# Altium PCB AT89S52单片机入门与提高_改.PcbDoc
Units mm, origin at the board's own origin, x right, y up, seen from the top; angles counter-clockwise.
Board outline 152.4 x 101.6 mm, 2 copper layers (Top Layer, Bottom Layer); 111 components, 112 nets, 451 pads, 42 vias.
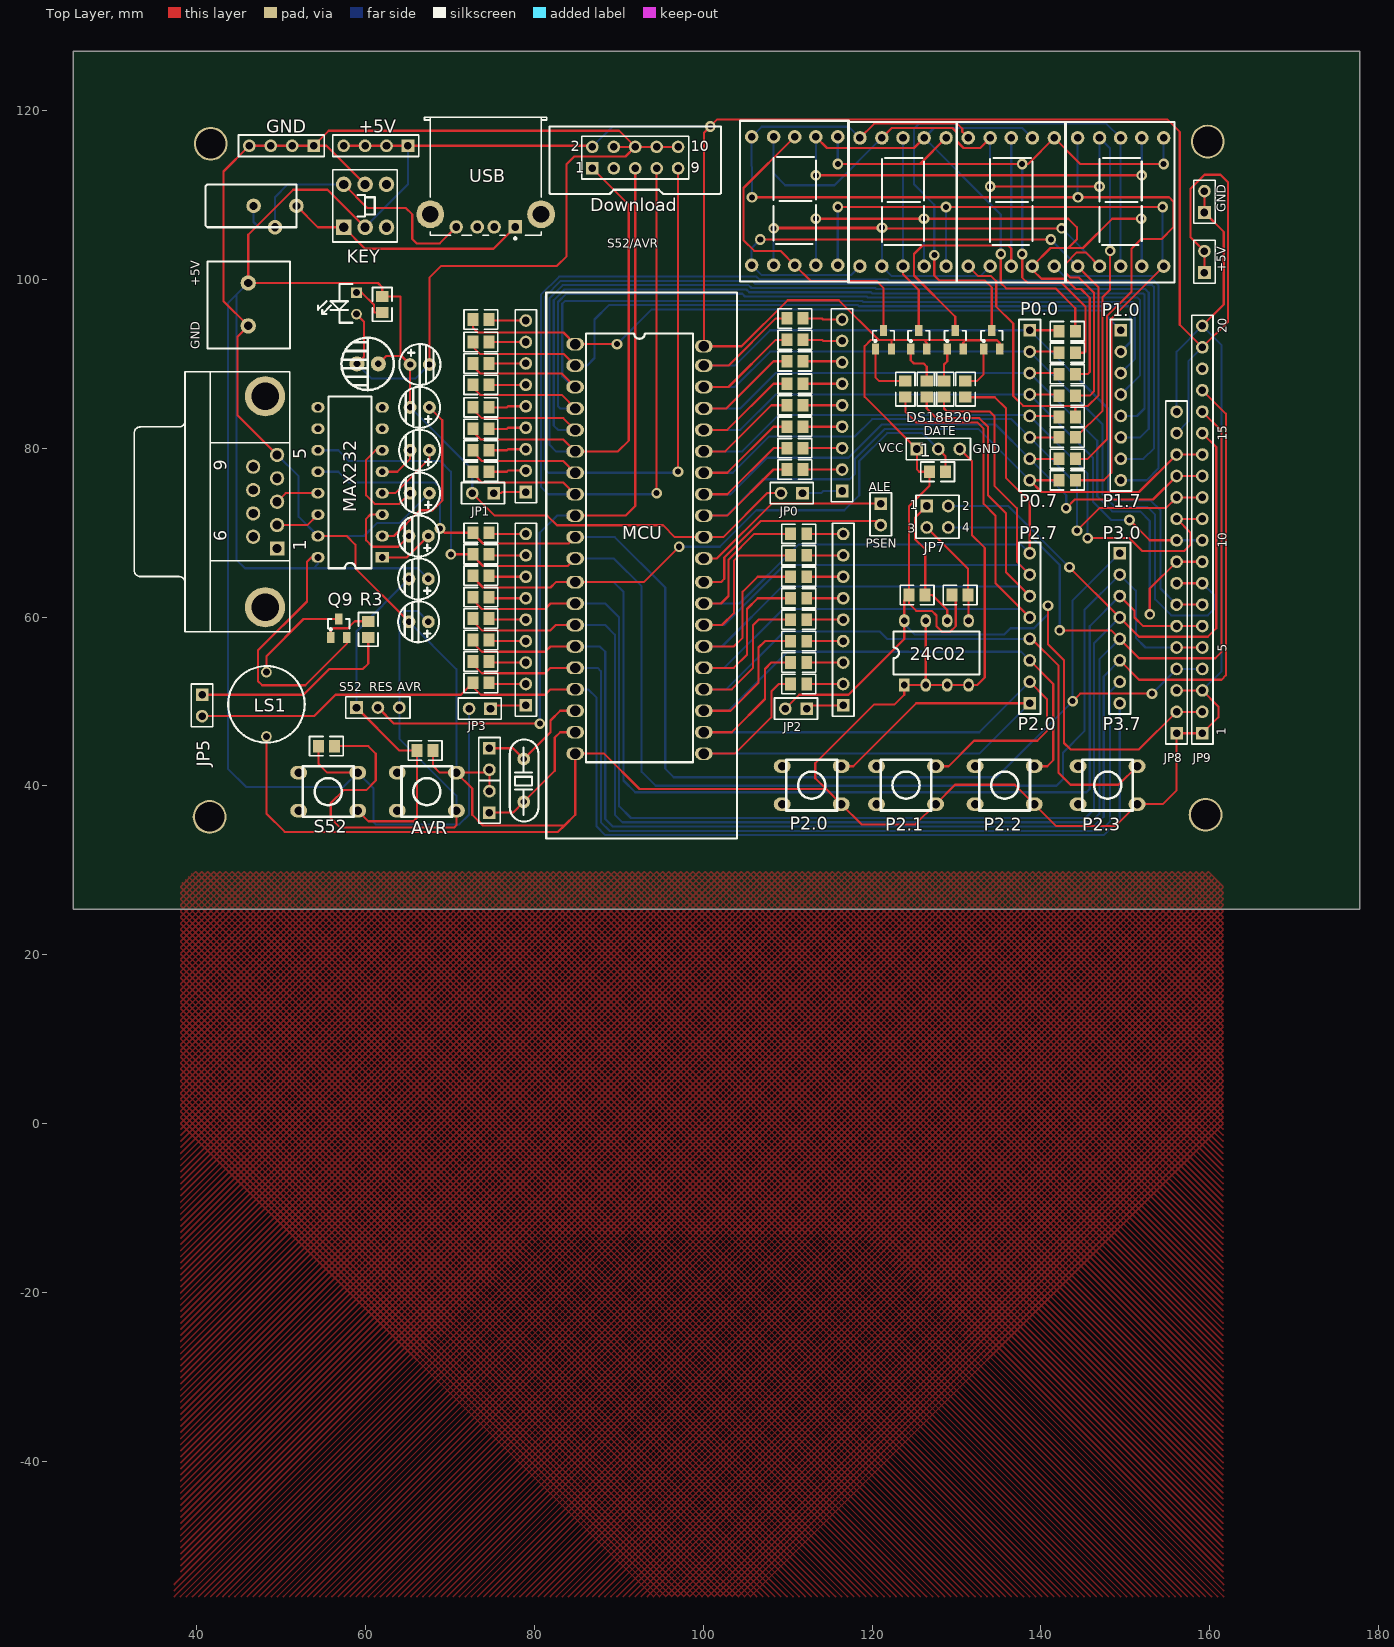
[diagram p0: Top Layer view]
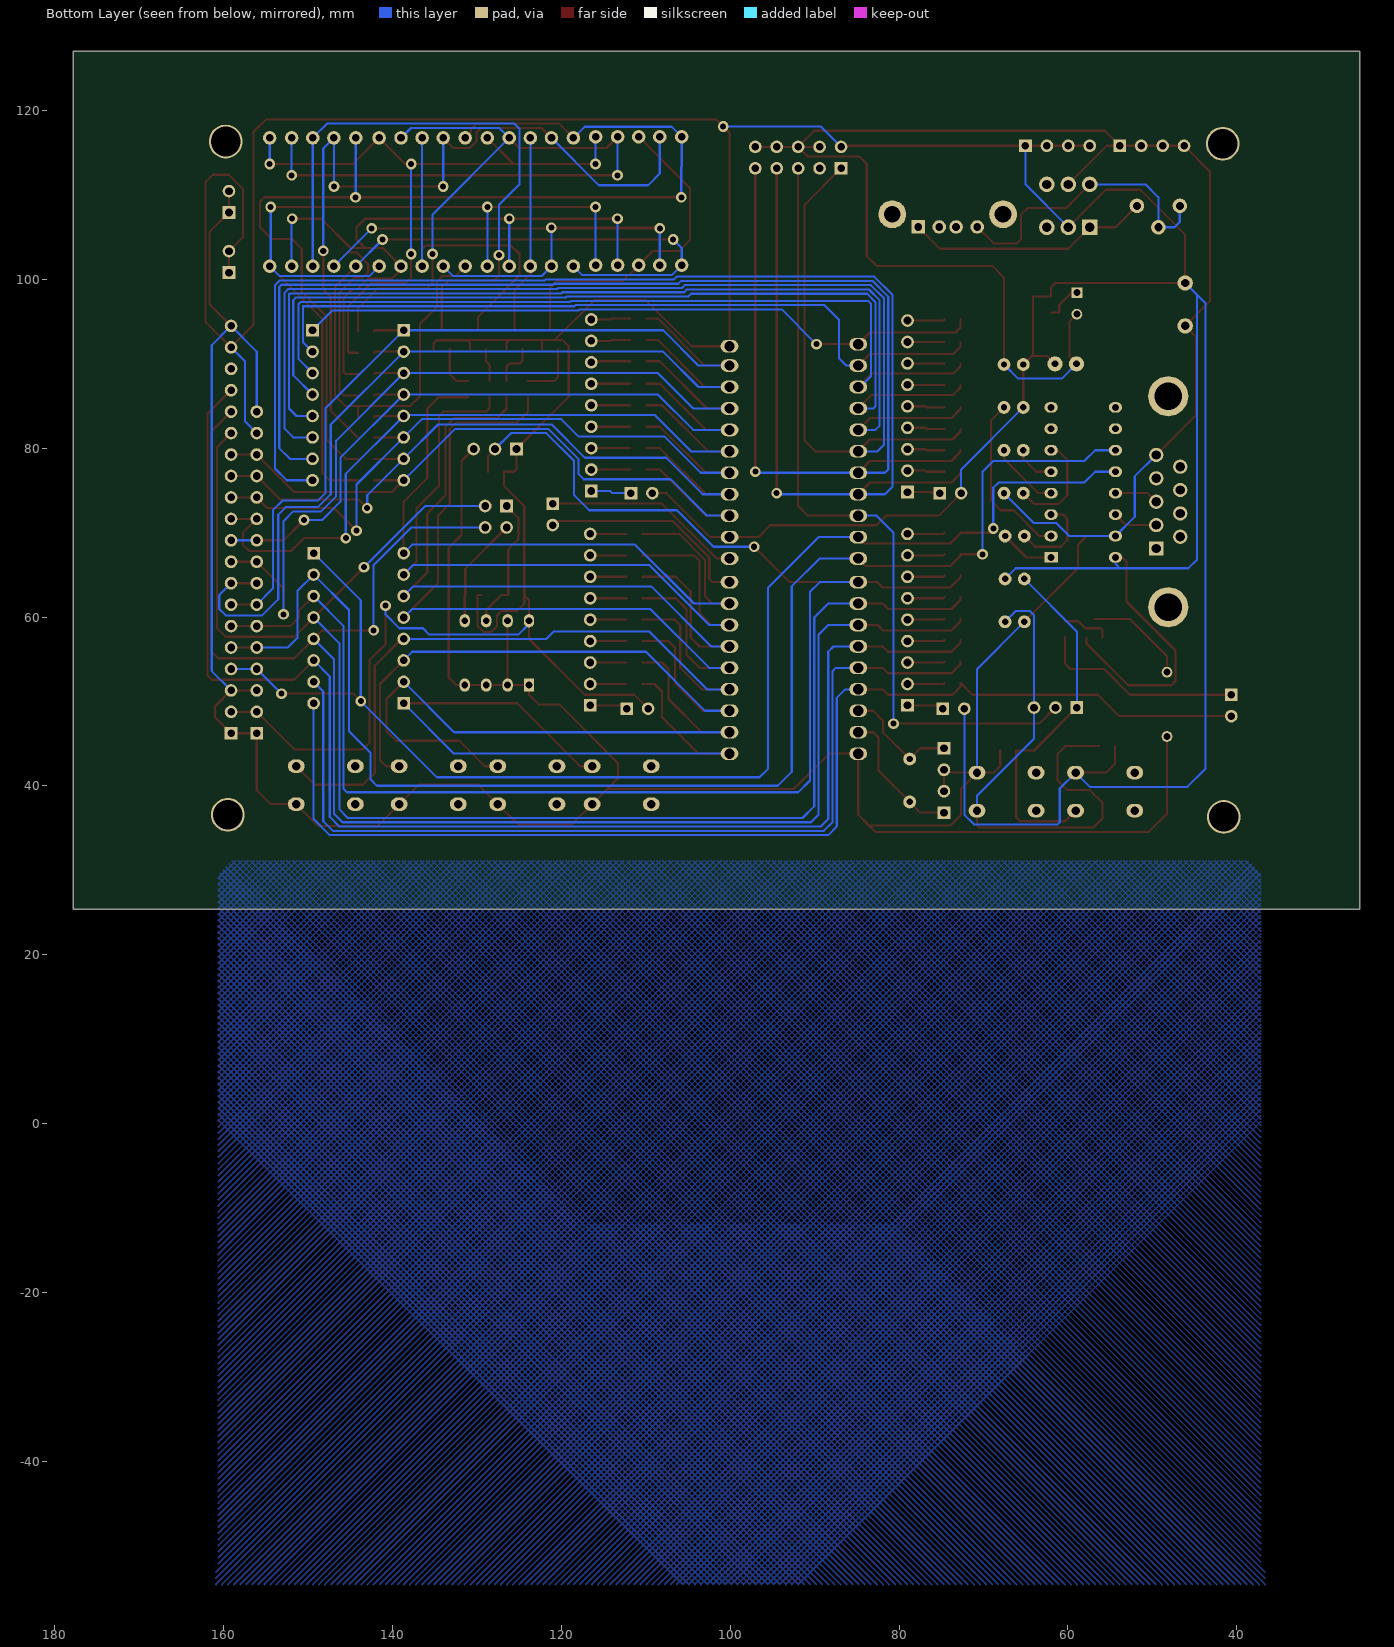
[diagram p1: Bottom Layer view, seen from below]

## Layer stack, top to bottom
Top Layer: signal copper 0.0356
Dielectric: dielectric 0.32, FR-4, Dk 4.8
Bottom Layer: signal copper 0.0356

## Board outline
25.4,25.4 177.8,25.4 177.8,127 25.4,127

## Design rules (kind name [scope] priority, off if disabled: settings)
Clearance [All] p1: gap=0.254
ComponentClearance [All] p1: gap=0.254 collisioncheckmode=3 verticalgap=0.254
PolygonConnect [All] p1: connectstyle=Relief reliefconductorwidth=0.254 reliefentries=4 polygonreliefangle="90 Angle"
RoutingVias [All] p1: holewidth=0.711 width=1.27 viastyle="Through Hole" minholewidth=0.711 minwidth=1.27 maxholewidth=0.711 maxwidth=1.27
SolderMaskExpansion [All] p1: expansion=0.102
TestPointUsage [All] p1: valid=0 allowmultiple=FALSE
Testpoint [All] p1: side=15 testpointundercomponent=TRUE minsize=1.016 maxsize=2.54 preferedsize=1.524 minholesize=0 maxholesize=1.016 preferedholesize=0.813 testpointgrid=0.025 style=1023 order=0123456789
Width Width_3 [InNet('NetJ1_1')] p1: maxlimit=0.5 minlimit=0.5 preferedwidth=0.5
Width Width_2 [InNet('NetJ1_2')] p2: maxlimit=0.5 minlimit=0.5 preferedwidth=0.5
Width Width_1 [InNet('VCC')] p3: maxlimit=0.5 minlimit=0.5 preferedwidth=0.5
Width [All] p4: maxlimit=0.254 minlimit=0.254 preferedwidth=0.254
17 further rules are at their usual default settings.

## Classes and differential pairs
component class AT89S52单片机入门与提高: +5V AVR Designator5

## Components (designator, comment, footprint, x,y, rotation, side; value= is the part's Value field where it differs from the comment)
1 "470" R2012-0805 127.762,77.216 r180 top (schematic designator R20)
24C02 "24LC02" DIP8 123.825,51.943 r90 top (schematic designator U2)
+5V "Comment" HDR-2 160.528,104.648 r90 top
+5V "" JK128 47.244,99.06 r0 top (schematic designator POWER)
+5V "" HDR1X4 65.024,115.824 r180 top
ALE "Comment" HDR-2 119.888,69.596 r270 top
AVR "" an-6*6 61.087,44.45 r180 top
C1 "100uF\25v" C-DJ-6 58.928,89.916 r180 top
C2 "10uf" C-DJ-4 65.024,67.056 r180 top
C3 "10uf" C-DJ-4 65.024,61.976 r180 top
C5 "10uf" C-DJ-4 67.691,87.376 r0 top
C6 "10uf" C-DJ-4 65.151,87.376 r180 top
C7 "10uf" C-DJ-4 65.151,82.296 r180 top
C8 "10uf" C-DJ-4 65.151,77.216 r180 top
C9 "10uf" C-DJ-4 65.024,72.136 r180 top
CX1 "30p" HDR1X2 74.676,36.83 r90 top
CX2 "30p" HDR1X2 74.676,44.45 r270 top
D1-0 "LED" R2012-0805 110.871,95.377 r180 top
D1-1 "LED" R2012-0805 73.66,95.25 r180 top
D1-2 "LED" R2012-0805 111.318,52.07 r180 top
D1-3 "LED" R2012-0805 73.66,69.977 r180 top
D2-0 "LED" R2012-0805 110.871,92.837 r180 top
D2-1 "LED" R2012-0805 73.66,92.583 r180 top
D2-2 "LED" R2012-0805 111.318,54.61 r180 top
D2-3 "LED" R2012-0805 73.66,67.437 r180 top
D3-0 "LED" R2012-0805 110.871,90.297 r180 top
D3-1 "LED" R2012-0805 73.66,90.043 r180 top
D3-2 "LED" R2012-0805 111.318,57.15 r180 top
D3-3 "LED" R2012-0805 73.66,64.897 r180 top
D4-0 "LED" R2012-0805 110.871,87.63 r180 top
D4-1 "LED" R2012-0805 73.66,87.503 r180 top
D4-2 "LED" R2012-0805 111.318,59.69 r180 top
D4-3 "LED" R2012-0805 73.66,62.357 r180 top
D5-0 "LED" R2012-0805 110.871,85.09 r180 top
D5-1 "LED" R2012-0805 73.66,84.836 r180 top
D5-2 "LED" R2012-0805 111.318,62.23 r180 top
D5-3 "LED" R2012-0805 73.66,59.817 r180 top
D6-0 "LED" R2012-0805 110.871,82.55 r180 top
D6-1 "LED" R2012-0805 73.66,82.296 r180 top
D6-2 "LED" R2012-0805 111.318,64.77 r180 top
D6-3 "LED" R2012-0805 73.66,57.277 r180 top
D7-0 "LED" R2012-0805 110.871,80.01 r180 top
D7-1 "LED" R2012-0805 73.66,79.756 r180 top
D7-2 "LED" R2012-0805 111.318,67.31 r180 top
D7-3 "LED" R2012-0805 73.66,54.737 r180 top
D8-0 "LED" R2012-0805 110.871,77.47 r180 top
D8-1 "LED" R2012-0805 73.66,77.216 r180 top
D8-2 "LED" R2012-0805 111.318,69.85 r180 top
D8-3 "LED" R2012-0805 73.66,52.197 r180 top
Download "Download" HDR-2x5 91.948,113.284 r0 top
DS1 "LG5011BSR" LED-BSR 110.744,106.807 r0 top
DS2 "LG5011BSR" LED-BSR 123.571,106.68 r0 top
DS3 "LG5011BSR" LED-BSR 136.398,106.68 r0 top
DS4 "LG5011BSR" LED-BSR 149.352,106.68 r0 top
DS18B20 "Comment" HDR-3 131.572,78.74 r0 top
GND "Comment" HDR-2 160.528,111.76 r90 top
GND "" HDR1X4 53.848,115.824 r180 top
J61 "D Connector 9" DSUB1.385-2H9 38.608,73.66 r90 top
JP0 "" HDR1X2 111.76,74.676 r180 top
JP1 "" HDR1X2 75.184,74.676 r180 top
JP2 "" HDR1X2 112.268,49.149 r180 top
JP3 "" HDR1X2 74.803,49.149 r180 top
JP5 "" HDR1X2 40.64,50.8 r270 top (schematic designator JP6)
JP7 "" HDR2X2 126.492,73.152 r270 top
JP8 "Header 16" HDR1X16 156.083,46.228 r90 top
JP9 "" HDR1X20 159.131,46.228 r90 top
KEY "SW-DPST" DPDT-6 59.944,108.712 r90 top
LED1 "LED" LED 58.42,96.393 r90 top
LS1 "" LS1PF 48.26,53.467 r270 top
MAX232 "MAX232" DIP16 61.976,67.056 r180 top (schematic designator U4)
MCU "AT89S52" AT89S52Pid 116.84,65.532 r0 top (schematic designator U1)
P0.0 "" HDR1X8 138.684,93.98 r270 top (schematic designator P0)
P1.0 "" HDR1X8 149.479,93.98 r270 top (schematic designator P1)
P2.0 "" HDR1X8 138.684,49.784 r90 top (schematic designator P2)
P2.0 "key1" an-6*6 106.68,45.212 r180 top
P2.1 "key2" an-6*6 117.856,45.212 r180 top
P2.2 "key3" an-6*6 129.54,45.212 r180 top
P2.3 "key4" an-6*6 141.732,45.212 r180 top
P3.0 "" HDR1X8 149.352,67.564 r270 top (schematic designator P3)
P-R0 "" HDR1X9#1 116.459,95.25 r270 top
P-R1 "" HDR1X9#1 78.994,95.123 r270 top
P-R2 "" HDR1X9#2 116.586,49.53 r90 top
P-R3 "" HDR1X9#1 78.994,69.85 r270 top
Q1 "2N3906" SO-G3 122.301,92.71 r0 top
Q2 "2N3906" SO-G3 126.492,92.71 r0 top
Q3 "2N3906" SO-G3 130.81,92.71 r0 top
Q4 "2N3906" SO-G3 135.128,92.71 r0 top
Q9 "2N3906" SO-G3 57.785,58.547 r0 top
R1 "4.7k" R2012-0805 61.976,97.028 r270 top
R3 "10k" R2012-0805 60.325,58.547 r90 top
R4 "10k" R2012-0805 130.429,62.611 r180 top
R5 "10k" R2012-0805 125.349,62.611 r180 top
R11 "470" R2012-0805 143.129,93.853 r0 top
R12 "470" R2012-0805 143.129,91.313 r0 top
R13 "470" R2012-0805 143.129,88.773 r0 top
R14 "470" R2012-0805 143.129,86.233 r0 top
R15 "470" R2012-0805 143.129,83.693 r0 top
R16 "470" R2012-0805 143.129,81.28 r0 top
R17 "470" R2012-0805 143.129,78.74 r0 top
R18 "470" R2012-0805 143.129,76.2 r0 top
R20 "470" R2012-0805 123.952,86.995 r90 top
R21 "470" R2012-0805 126.492,86.995 r90 top
R22 "470" R2012-0805 128.524,86.995 r90 top
R23 "470" R2012-0805 131.064,86.995 r90 top
R51 "10k" R2012-0805 67.056,44.196 r0 top
Ravr "10k" R2012-0805 55.372,44.704 r180 top
RES "" HDR1X3 58.928,49.276 r0 top
S52 "" an-6*6 49.403,44.45 r180 top
USB "" USB-5V 70.612,108.712 r90 top
Y "Y" 11.0592M 78.74,43.18 r90 top
? "Comment" "prower xiao" 49.276,103.632 r0 top

## Footprints (in the part's own frame and the unit in brackets; to place one, negate y for a bottom-side part, rotate by r counter-clockwise, add the part's x,y. Pads: shape width x height; smd on the part's side, far side on the other; paste and mask are expansions set on the pad)
11.0592M [mil]
  round 60 hole 30: 1(-200,0) 2(0,0)
  silkscreen extent -292,-68 92,65
an-6*6 [mm]
  oval 2x1.6 hole 1: 1(-9.675,7.381) 2(-9.675,2.881) 3(-2.675,2.881) 4(-2.675,7.381)
  silkscreen extent -9.17,2.13 -3.18,8.13
AT89S52Pid [mil]
  oval 82.87x59.24 hole 47.75: 1(-1260.15,1054.96) 2(-1260.15,954.96) 3(-1260.15,854.96) 4(-1260.15,754.96) 5(-1260.15,654.96) 6(-1260.15,554.96) 7(-1260.15,454.96) 8(-1260.15,354.96) 9(-1260.15,254.96) 10(-1260.15,154.96) 11(-1260.15,54.96) 12(-1260,-55) 13(-1260,-155) 14(-1260,-255) 15(-1260,-355) 16(-1260,-455) 17(-1260,-555) 18(-1260,-655) 19(-1260,-755) 20(-1260,-855) 21(-660,-855) 22(-660,-755) 23(-660,-655) 24(-660,-555) 25(-660,-455) 26(-660,-355) 27(-660,-255) 28(-660,-155) 29(-660,-55) 30(-660.15,54.96) 31(-660.15,154.96) 32(-660.15,254.96) 33(-660.15,354.96) 34(-660.15,454.96) 35(-660.15,554.96) 36(-660.15,654.96) 37(-660.15,754.96) 38(-660.15,854.96) 39(-660.15,954.96) 40(-660,1045)
  silkscreen extent -1395,-1250 -505,1295
C-DJ-4 [mil]
  round 60 hole 30: 1(-95,100) 2(-5,100)
  silkscreen extent -145,5 46,195
C-DJ-6 [mm]
  round 1.8 hole 0.8: 1(-2.591,-0.076) 2(-0.051,-0.076)
  silkscreen extent -4.42,-3.18 1.78,3.02
DIP8 [mil]
  rect 62x48 hole 32: 1(-0.15,-0.04)
  oval 62x48 hole 32: 2(-0.15,-100.04) 3(-0.15,-200.04) 4(-0.15,-300.04) 5(299.85,-300.04) 6(299.85,-200.04) 7(299.85,-100.04) 8(299.85,-0.04)
  silkscreen extent 50,-350 250,50
DIP16 [mil]
  rect 62x49.21 hole 32: 1(-0.15,-0.04)
  oval 62x49.21 hole 32: 2(-0.15,-100.04) 3(-0.15,-200.04) 4(-0.15,-300.04) 5(-0.15,-400.04) 6(-0.15,-500.04) 7(-0.15,-600.04) 8(-0.15,-700.04) 9(299.85,-700.04) 10(299.85,-600.04) 11(299.85,-500.04) 12(299.85,-400.04) 13(299.85,-300.04) 14(299.85,-200.04) 15(299.85,-100.04) 16(299.85,-0.04)
  silkscreen extent 50,-750 250,50
DPDT-6 [mm]
  round 1.85 hole 1.1: 0(-2.54,-2.54) 0(2.54,-2.54) 2(-2.54,0) 3(2.54,0) 4(2.54,2.54)
  rect 1.85x1.85 hole 1.1: 1(-2.54,2.54)
  silkscreen extent -4.28,-3.81 4.28,3.81
DSUB1.385-2H9 [mm] "Connector; D Subminiature; 9 Position; Right Angle; Pitch 1.385 mm"
  rect 1.69x1.69 hole 1.09: 1(-5.54,-10.92)
  round 1.69 hole 1.09: 2(-2.77,-10.92) 3(0,-10.92) 4(2.77,-10.92) 5(5.54,-10.92) 6(-4.155,-8.08) 7(-1.385,-8.08) 8(1.385,-8.08) 9(4.155,-8.08)
  round 4.76 hole 3.26: 10(-12.495,-9.5) 11(12.495,-9.5)
  silkscreen extent -15.4,-12.4 15.4,6
HDR1X2 [mm] "Connector; Header; 2 Position"
  rect 1.5x1.5 hole 0.9: 1(0,0)
  round 1.5 hole 0.9: 2(2.54,0)
  silkscreen extent -1.27,-1.27 3.81,1.27
HDR1X3 [mm] "Connector; Header; 3 Position"
  rect 1.5x1.5 hole 0.9: 1(0,0)
  round 1.5 hole 0.9: 2(2.54,0) 3(5.08,0)
  silkscreen extent -1.27,-1.27 6.35,1.27
HDR1X4 [mm] "Connector; Header; 4 Position"
  rect 1.5x1.5 hole 0.9: 1(0,0)
  round 1.5 hole 0.9: 2(2.54,0) 3(5.08,0) 4(7.62,0)
  silkscreen extent -1.27,-1.27 8.89,1.27
HDR1X8 [mm] "Connector; Header; 8 Position"
  rect 1.5x1.5 hole 0.9: 1(0,0)
  round 1.5 hole 0.9: 2(2.54,0) 3(5.08,0) 4(7.62,0) 5(10.16,0) 6(12.7,0) 7(15.24,0) 8(17.78,0)
  silkscreen extent -1.27,-1.27 19.05,1.27
HDR1X9#1 [mm] "Connector; Header; 9 Position"
  round 1.5 hole 0.9: 1(0,0) 2(2.54,0) 3(5.08,0) 4(7.62,0) 5(10.16,0) 6(12.7,0) 7(15.24,0) 8(17.78,0)
  rect 1.5x1.5 hole 0.9: 9(20.32,0)
  silkscreen extent -1.27,-1.27 21.59,1.27
HDR1X9#2 [mm] "Connector; Header; 9 Position"
  rect 1.5x1.5 hole 0.9: 1(0,0)
  round 1.5 hole 0.9: 2(2.54,0) 3(5.08,0) 4(7.62,0) 5(10.16,0) 6(12.7,0) 7(15.24,0) 8(17.78,0) 9(20.32,0)
  silkscreen extent -1.27,-1.27 21.59,1.27
HDR1X16 [mm] "Connector; Header; 16 Position"
  rect 1.5x1.5 hole 0.9: 1(0,0)
  round 1.5 hole 0.9: 2(2.54,0) 3(5.08,0) 4(7.62,0) 5(10.16,0) 6(12.7,0) 7(15.24,0) 8(17.78,0) 9(20.32,0) 10(22.86,0) 11(25.4,0) 12(27.94,0) 13(30.48,0) 14(33.02,0) 15(35.56,0) 16(38.1,0)
  silkscreen extent -1.27,-1.27 39.37,1.27
HDR1X20 [mm] "Connector; Header; 20 Position"
  rect 1.5x1.5 hole 0.9: 1(0,0)
  round 1.5 hole 0.9: 2(2.54,0) 3(5.08,0) 4(7.62,0) 5(10.16,0) 6(12.7,0) 7(15.24,0) 8(17.78,0) 9(20.32,0) 10(22.86,0) 11(25.4,0) 12(27.94,0) 13(30.48,0) 14(33.02,0) 15(35.56,0) 16(38.1,0) 17(40.64,0) 18(43.18,0) 19(45.72,0) 20(48.26,0)
  silkscreen extent -1.27,-1.27 49.53,1.27
HDR2X2 [mm] "Connector; Header; 2x2 Position"
  rect 1.5x1.5 hole 0.9: 1(0,0)
  round 1.5 hole 0.9: 2(0,2.54) 3(2.54,0) 4(2.54,2.54)
  silkscreen extent -1.27,-1.27 3.81,3.81
HDR-2 [mm]
  rect 1.5x1.5 hole 0.9: 1(-3.84,1.148)
  round 1.5 hole 0.9: 2(-1.3,1.148)
  silkscreen extent -5.11,-0.12 -0.03,2.42
HDR-2x5 [mm]
  rect 1.5x1.5 hole 0.9: 1(-5.08,-0.127)
  round 1.5 hole 0.9: 2(-5.08,2.413) 3(-2.54,-0.127) 4(-2.54,2.413) 5(0,-0.127) 6(0,2.413) 7(2.54,-0.127) 8(2.54,2.413) 9(5.08,-0.127) 10(5.08,2.413)
  silkscreen extent -10.16,-3.17 10.16,4.83
HDR-3 [mm]
  rect 1.5x1.5 hole 0.9: 1(-6.253,1.165)
  round 1.5 hole 0.9: 2(-3.713,1.165) 3(-1.173,1.165)
  silkscreen extent -7.52,-0.11 0.1,2.43
JK128 [mil]
  round 71.81 hole 39.37: 1(-45,20) 2(-45,-180)
  silkscreen extent -235,-285 150,120
LED [mil]
  rect 50x50 hole 32: 1(80,-20)
  round 50 hole 32: 2(-20,-20)
  silkscreen extent -60,0 120,160
LED-BSR [mm]
  round 1.6 hole 0.9: 1(-5,-5.119) 2(-2.4,-5.119) 3(0.1,-5.119) 4(2.6,-5.119) 5(5.2,-5.119) 6(5.2,10.081) 7(2.6,10.081) 8(0.1,10.081) 9(-2.4,10.081) 10(-5,10.081)
  silkscreen extent -6.4,-7.07 6.5,11.98
LS1PF [mil] "LS1"
  round 50 hole 32: 1(0,0) 2(300,0)
  silkscreen extent -28,-178 328,178
"prower xiao" [mm]
  round 1.724 hole 0.962: 1(2.54,5.08) 2(0,2.54) 3(-2.54,5.08)
  silkscreen extent -8.25,2.54 2.54,7.62
R2012-0805 [mm] "Thermistor; 2 Leads"
  rect 1.3x1.5 smd: 1(-0.95,0) 2(0.95,0)
  silkscreen extent -2,-1.15 2,1.15
SO-G3 [mm] "SOT-23; 3 Leads; Body 3.0 x 2.6 mm, inc. leads (LxW max)"
  rect 0.85x1.3 smd: 1(-1.9,-0.983) 2(0,-0.983) 3(-0.95,1.217)
  silkscreen extent -2.23,-0.12 0.32,1.22
USB-5V [mm]
  rect 1.6x1.6 hole 0.92: 1(-2.503,-7.123)
  round 1.6 hole 0.92: 2(-2.503,-4.624) 3(-2.503,-2.624) 4(-2.503,-0.124)
  round 3.3 hole 2: 5(-1.002,2.947) 6(-1.002,-10.193)
  silkscreen extent -3.98,-10.87 10.5,3.63

## Part data
1 R1 R3 R4 R5 R11 R12 R13 R14 R15 R16 R17 R18 R20 R21 R22 R23 R51 Ravr: library part RES2
+5V JP0 JP1 JP2 JP3 JP5: library part "Header 2", "Header, 2-Pin"
+5V GND USB: library part "Header 4", "Header, 4-Pin"
AVR S52: library part SW-PB, "Switch"
C1 C2 C3 C5 C6 C7 C8 C9: library part "CAPACITOR POL", "Capacitor"
CX1 CX2: library part CAP, "Capacitor"
Download: library part "Header 5X2", "Header, 5-Pin, Dual row"
DS1 DS2 DS3 DS4: library part "Dpy Blue-CA", "14.2 mm General Purpose Blue 7-Segment Display: CA, RH DP, Gray Surface"
J61: "Receptacle Assembly, 9 Position, Right Angle"
JP7: library part "Header 2X2", "Header, 2-Pin, Dual row"
JP8: "Header, 16-Pin"
JP9: library part "Header 20", "Header, 20-Pin"
KEY: "Double-Pole, Single-Throw Switch"
LS1: library part Speaker, "Loudspeaker"
MCU: library part 8051
P0.0 P1.0 P2.0 P3.0: library part MHDR1X8, "Header, 8-Pin"
P2.0 P2.1 P2.2 P2.3: library part key
P-R0 P-R1 P-R2 P-R3: library part MHDR1X9, "Header, 9-Pin"
Q1 Q2 Q3 Q4 Q9: "PNP General Purpose Amplifier"
RES: library part "Header 3", "Header, 3-Pin"
Y: library part CRYSTAL, "Crystal"

## Free pads (board coordinates)
  round 4 hole 3.5: ""(41.529,36.322) ""(41.656,116.078) ""(159.512,36.576) ""(159.766,116.332)

## Via types
v1: diameter 1.27, hole 0.711, Top Layer to Bottom Layer, 42 vias

## Nets (pads, with @x,y where several pads share a name; then routed paths per layer and width w, separated by ;. In a path a pad name is that pad's centre, name@x,y a point inside that pad or via, vN(x,y) a via of type N, cw(c..) or ccw(c..) an arc to the next point about the centre after c; other vN are vias at no path point)
A: DS1.7 DS2.7 DS3.7 DS4.7 R11.2 | length 109
  Top Layer w0.254: v1(113.344,112.328) v1(151.952,112.328) ; DS1.7 114.662,115.57 124.98,115.57 DS2.7 ; v1(135.255,102.997) 135.255,99.568 135.89,98.933 141.742,98.933 144.079,96.596 R11.2
  Bottom Layer w0.254: v1(113.344,112.328) DS1.7 ; v1(135.255,102.997) 135.255,107.677 DS2.7 127.352,117.942 137.817,117.942 DS3.7 ; v1(151.952,112.328) DS4.7
ALE: ALE.1 MCU.30 | length 23.7
  Top Layer w0.254: MCU.30 101.599,66.928 108.107,73.436 ALE.1
B: DS1.6 DS2.6 DS3.6 DS4.6 R12.2 | length 80.8
  Top Layer w0.254: v1(115.951,113.665) 125.675,113.665 ; DS2.6 125.675,113.665 ; v1(137.795,102.997) 137.795,100.203 138.43,99.568 142.494,99.568 145.288,96.774 145.288,91.44 145.161,91.313 R12.2 ; v1(154.552,113.658) 144.701,113.658 DS3.6 138.502,113.665 v1(137.795,113.665) 125.675,113.665
  Bottom Layer w0.254: DS1.6 115.944,113.672 v1(115.951,113.665) ; v1(137.795,102.997) v1(137.795,113.665) ; v1(154.552,113.658) DS4.6
C: DS1.4 DS2.4 DS3.4 DS4.4 R13.2 | length 85.4
  Top Layer w0.254: v1(113.344,107.188) v1(126.171,107.188) 143.256,107.188 144.272,106.172 144.272,104.728 143.256,103.712 ; R13.2 145.542,88.773 145.796,89.027 145.796,97.814 144.749,98.861 144.134,98.861 142.919,100.076 140.081,100.076 138.998,101.159 DS3.4 141.149,103.712 143.256,103.712 ; v1(151.892,107.188) 148.463,107.188 144.987,103.712 143.256,103.712
  Bottom Layer w0.254: DS1.4 v1(113.344,107.188) ; DS2.4 v1(126.171,107.188) ; v1(151.892,107.188) 151.952,107.128 DS4.4
D: DS1.2 DS2.2 DS3.2 DS4.2 R14.2 | length 100.9
  Top Layer w0.254: v1(121.183,106.121) 108.42,106.121 v1(108.344,106.045) 121.183,106.045 v1(142.468,106.045) ; R14.2 145.796,86.233 146.304,86.741 146.304,98.425 144.526,100.203 143.51,100.203 142.875,100.838 142.875,101.807 144.272,103.204 145.309,103.204 DS4.2
  Bottom Layer w0.254: DS1.2 v1(108.344,106.045) ; v1(121.183,106.121) 121.171,106.109 DS2.2 122.352,100.38 132.817,100.38 DS3.2 ; v1(142.468,106.045) DS4.2
DP: DS1.5 DS2.5 DS3.5 DS4.5 R18.2 | length 105.1
  Top Layer w0.254: v1(115.951,108.585) v1(128.771,108.585) v1(154.432,108.585) ; R18.2 147.447,76.2 148.336,77.089 148.336,95.345 DS4.5
  Bottom Layer w0.254: DS1.5 115.944,108.578 v1(115.951,108.585) ; DS2.5 v1(128.771,108.585) ; DS3.5 142.779,100.38 153.371,100.38 DS4.5 154.432,101.681 v1(154.432,108.585)
E: DS1.1 DS2.1 DS3.1 DS4.1 R15.2 | length 103.4
  Top Layer w0.254: v1(106.76,104.728) v1(141.185,104.728) ; DS3.1 132.579,100.38 134.112,100.38 134.722,99.77 134.722,96.774 136.728,94.767 136.728,86.182 137.897,85.014 143.901,85.014 ; R15.2 144.079,84.836 143.901,85.014 ; DS4.1 146.812,99.101 146.812,86.233 145.593,85.014 143.901,85.014
  Bottom Layer w0.254: v1(106.76,104.728) 105.744,103.712 DS1.1 106.925,100.507 117.517,100.507 DS2.1 ; v1(141.185,104.728) DS4.1
F: DS1.9 DS2.9 DS3.9 DS4.9 R16.2 | length 97.7
  Top Layer w0.254: DS2.9 122.352,117.942 129.531,117.942 130.073,117.399 130.073,116.332 130.835,115.57 132.807,115.57 DS3.9 ; v1(133.998,110.998) v1(146.939,110.998) ; R16.2 144.145,81.28 147.32,84.455 147.32,97.917 148.209,98.806 v1(148.209,103.378)
  Bottom Layer w0.254: DS1.9 108.344,112.534 109.728,111.15 115.561,111.15 DS2.9 ; v1(133.998,110.998) DS3.9 ; v1(146.939,110.998) 146.952,111.011 DS4.9 148.209,115.504 v1(148.209,103.378)
G: DS1.10 DS2.10 DS3.10 DS4.10 R17.2 | length 130.2
  Top Layer w0.254: v1(105.791,109.728) v1(144.399,109.728) 155.194,109.728 155.702,109.22 155.702,106.172 154.305,104.775 151.892,104.775 150.749,103.632 150.749,98.552 147.828,95.631 147.828,81.026 145.542,78.74 R17.2 ; DS2.10 120.26,118.45 130.095,118.45 130.688,117.856 130.688,117.47 DS3.10
  Bottom Layer w0.254: v1(105.791,109.728) 105.791,109.855 DS1.10 106.941,118.085 117.247,118.085 DS2.10 ; DS4.10 144.352,109.775 v1(144.399,109.728)
GND: 24C02.1 24C02.2 24C02.3 24C02.4 24C02.7 +5V.2@46.101,94.488 AVR.2 C1.2 C3.2 C5.2 C8.1 CX1.2 CX2.2 Download.4 Download.6 Download.8 Download.10 DS18B20.3 GND.1 GND.2 GND.3 GND.4 J61.5 JP8.1 JP8.3 JP8.16 JP9.1 JP9.3 JP9.20 KEY.3 LED1.2 LS1.2 MAX232.15 MCU.20 P2.0.1@116.355,37.831 P2.1.1 P2.2.1 P2.3.1 R51.2 | length 554.6
  Top Layer w0.254: LS1.2 48.26,36.703 50.419,34.544 82.804,34.544 83.566,35.306 ; J61.5 44.831,83.897 44.831,93.218 46.101,94.488 43.18,97.409 43.18,112.776 GND.4 GND.3 51.308,115.824 GND.1@53.848,115.824 ; MAX232.15 57.784,69.597 58.801,68.58 58.801,65.786 C3.2 ; LED1.2 59.817,94.996 59.817,90.83 C1.2 ; KEY.3 55.372,115.824 GND.1@53.848,115.824 ; C5.2 67.564,100.203 68.961,101.6 82.677,101.6 83.82,102.743 83.82,113.665 84.709,114.554 90.805,114.554 Download.6 ; R51.2 68.006,42.357 68.794,41.569 AVR.2 ; CX1.2 CX2.2 74.335,41.569 AVR.2 ; Download.4 Download.6 ; Download.10 Download.8 Download.6 ; 24C02.7 24C02.2 ; DS18B20.3 131.826,78.478 131.826,69.723 133.35,68.199 133.35,52.832 132.457,51.939 24C02.4 24C02.3 24C02.2 ; JP8.3 JP9.3 161.036,49.403 161.036,48.133 JP9.1 JP8.1 156.083,39.482 154.432,37.831 P2.3.1 148.801,35.225 141.821,35.225 P2.2.1 136.914,40.132 129.832,40.132 P2.1.1 125.133,35.433 118.753,35.433 116.355,37.831 114.562,39.624 ; JP9.20 161.671,97.028 161.671,105.629 159.38,107.92 GND.2@159.38,110.46 ; GND.1@53.848,115.824 55.626,117.602 90.043,117.602 Download.6 ; AVR.2 72.644,39.687 72.644,36.576 73.914,35.306 83.566,35.306 ; 83.566,35.306 84.836,36.576 MCU.20 88.265,43.815 92.456,39.624 114.562,39.624 ; 114.562,39.624 113.284,40.902 113.284,42.672 120.27,49.658 122.684,49.658 123.826,50.8 24C02.1 24C02.2
  Bottom Layer w0.254: J61.5 52.07,76.658 52.07,71.887 MAX232.15 59.818,69.597 61.341,71.12 64.008,71.12 C8.1 ; C1.2 60.731,88.24 65.888,88.24 C5.2 ; C3.2 70.762,53.825 AVR.2 ; JP8.16 156.083,91.44 JP9.20 161.417,92.202 161.417,53.594 JP9.3
NetAVR_1: AVR.1 C3.1 Ravr.1 RES.3 | length 64
  Top Layer w0.254: Ravr.1 60.325,44.704 61.214,43.815 61.214,40.64 60.071,39.497 57.404,39.497 55.88,37.973 55.88,36.195 57.023,35.052 70.485,35.052 70.762,35.329 AVR.1
  Bottom Layer w0.254: C3.1 66.167,60.706 64.516,60.706 64.008,60.198 RES.3 64.008,45.593 70.762,38.839 AVR.1
NetC2_2: C2.2 R51.1 RES.1 S52.1 | length 42.8
  Top Layer w0.254: RES.1 64.008,44.196 R51.1 66.106,36.261 65.659,35.814 60.333,35.814 S52.1
  Bottom Layer w0.254: RES.1 58.928,58.293 C2.2
NetC6_1: C6.1 MAX232.2 | length 20.5
  Top Layer w0.254: MAX232.2 63.374,69.597 66.421,72.644 67.945,72.644 69.088,73.787 69.088,83.312 C6.1
NetC7_1: C7.1 MAX232.4 | length 8.3
  Top Layer w0.254: MAX232.4 63.501,74.677 67.564,78.74 C7.1
NetC7_2: C7.2 MAX232.5 | length 4.9
  Top Layer w0.254: MAX232.5 63.755,77.217 65.278,78.74 C7.2
NetC8_2: C8.2 MAX232.6 | length 12.7
  Top Layer w0.254: MAX232.6 61.215,79.757 60.071,78.613 60.071,74.422 61.087,73.406 64.008,73.406 C8.2
NetC9_1: C9.1 MAX232.1 | length 6.5
  Top Layer w0.254: MAX232.1 64.898,67.057 C9.1
NetC9_2: C9.2 MAX232.3 | length 10.6
  Top Layer w0.254: MAX232.3 60.58,72.137 60.071,71.628 60.071,69.088 60.833,68.326 63.881,68.326 C9.2
NetD1-0_1: D1-0.1 P-R0.1 | length 4.7
  Top Layer w0.254: D1-0.1 114.071,95.377 114.198,95.25 P-R0.1
NetD1-1_1: D1-1.1 P-R1.1 | length 4.4
  Top Layer w0.254: D1-1.1 74.737,95.123 P-R1.1
NetD1-2_1: D1-2.1 P-R2.2 | length 4.3
  Top Layer w0.254: D1-2.1 P-R2.2
NetD1-3_1: D1-3.1 P-R3.1 | length 4.4
  Top Layer w0.254: D1-3.1 74.737,69.85 P-R3.1
NetD2-0_1: D2-0.1 P-R0.2 | length 4.7
  Top Layer w0.254: D2-0.1 114.071,92.837 114.198,92.71 P-R0.2
NetD2-1_1: D2-1.1 P-R1.2 | length 4.4
  Top Layer w0.254: D2-1.1 P-R1.2
NetD2-2_1: D2-2.1 P-R2.3 | length 4.3
  Top Layer w0.254: D2-2.1 P-R2.3
NetD2-3_1: D2-3.1 P-R3.2 | length 4.4
  Top Layer w0.254: D2-3.1 74.737,67.31 P-R3.2
NetD3-0_1: D3-0.1 P-R0.3 | length 4.7
  Top Layer w0.254: D3-0.1 116.332,90.297 P-R0.3
NetD3-1_1: D3-1.1 P-R1.3 | length 4.4
  Top Layer w0.254: D3-1.1 P-R1.3
NetD3-2_1: D3-2.1 P-R2.4 | length 4.3
  Top Layer w0.254: D3-2.1 P-R2.4
NetD3-3_1: D3-3.1 P-R3.3 | length 4.4
  Top Layer w0.254: D3-3.1 74.737,64.77 P-R3.3
NetD4-0_1: D4-0.1 P-R0.4 | length 4.6
  Top Layer w0.254: D4-0.1 P-R0.4
NetD4-1_1: D4-1.1 P-R1.4 | length 4.4
  Top Layer w0.254: D4-1.1 P-R1.4
NetD4-2_1: D4-2.1 P-R2.5 | length 4.3
  Top Layer w0.254: D4-2.1 P-R2.5
NetD4-3_1: D4-3.1 P-R3.4 | length 4.4
  Top Layer w0.254: D4-3.1 74.737,62.23 P-R3.4
NetD5-0_1: D5-0.1 P-R0.5 | length 4.6
  Top Layer w0.254: D5-0.1 P-R0.5
NetD5-1_1: D5-1.1 P-R1.5 | length 4.4
  Top Layer w0.254: D5-1.1 76.733,84.836 76.86,84.963 P-R1.5
NetD5-2_1: D5-2.1 P-R2.6 | length 4.3
  Top Layer w0.254: D5-2.1 P-R2.6
NetD5-3_1: D5-3.1 P-R3.5 | length 4.4
  Top Layer w0.254: D5-3.1 74.737,59.69 P-R3.5
NetD6-0_1: D6-0.1 P-R0.6 | length 4.6
  Top Layer w0.254: D6-0.1 P-R0.6
NetD6-1_1: D6-1.1 P-R1.6 | length 4.4
  Top Layer w0.254: D6-1.1 76.733,82.296 76.86,82.423 P-R1.6
NetD6-2_1: D6-2.1 P-R2.7 | length 4.3
  Top Layer w0.254: D6-2.1 P-R2.7
NetD6-3_1: D6-3.1 P-R3.6 | length 4.4
  Top Layer w0.254: D6-3.1 74.737,57.15 P-R3.6
NetD7-0_1: D7-0.1 P-R0.7 | length 4.6
  Top Layer w0.254: D7-0.1 P-R0.7
NetD7-1_1: D7-1.1 P-R1.7 | length 4.4
  Top Layer w0.254: D7-1.1 76.733,79.756 76.86,79.883 P-R1.7
NetD7-2_1: D7-2.1 P-R2.8 | length 4.3
  Top Layer w0.254: D7-2.1 P-R2.8
NetD7-3_1: D7-3.1 P-R3.7 | length 4.4
  Top Layer w0.254: D7-3.1 74.737,54.61 P-R3.7
NetD8-0_1: D8-0.1 P-R0.8 | length 4.6
  Top Layer w0.254: D8-0.1 P-R0.8
NetD8-1_1: D8-1.1 P-R1.8 | length 4.4
  Top Layer w0.254: D8-1.1 76.733,77.216 76.86,77.343 P-R1.8
NetD8-2_1: D8-2.1 P-R2.9 | length 4.3
  Top Layer w0.254: D8-2.1 P-R2.9
NetD8-3_1: D8-3.1 P-R3.8 | length 4.4
  Top Layer w0.254: D8-3.1 74.737,52.07 P-R3.8
NetDS1_8: DS1.3 DS1.8 Q1.3 | length 38.7
  Top Layer w0.254: DS1.8 104.775,110.819 104.775,104.648 106.045,103.378 109.154,103.378 DS1.3 112.71,99.822 120.523,99.822 121.351,98.994 Q1.3
NetDS2_8: DS2.3 DS2.8 Q2.3 | length 23.6
  Top Layer w0.254: DS2.3 123.671,100.611 125.542,98.74 Q2.3
  Bottom Layer w0.254: DS2.3 DS2.8
NetDS3_8: DS3.3 DS3.8 Q3.3 | length 40.5
  Top Layer w0.254: Q3.3 129.86,95.565 124.968,100.457 124.968,102.997 125.984,104.013 136.144,104.013 136.498,103.659 DS3.3
  Bottom Layer w0.254: DS3.3 DS3.8
NetDS4_8: DS4.3 DS4.8 Q4.3 | length 71.5
  Top Layer w0.254: v1(127.381,102.87) 127.381,100.457 127.966,99.872 133.358,99.872 134.178,99.052 Q4.3
  Bottom Layer w0.254: v1(127.381,102.87) 127.381,108.839 124.968,111.252 124.968,117.856 125.562,118.45 147.763,118.45 DS4.8 DS4.3
NetJ1_1: ?.1 KEY.1 USB.1 | length 29.1
  Top Layer w0.254: ?.1 54.356,106.172 KEY.1 59.944,103.632 75.158,103.632 USB.1
NetJ1_2: ?.2 ?.3 KEY.4 USB.4 | length 35.8
  Top Layer w0.254: KEY.4 60.198,108.458 64.77,108.458 65.532,107.696 65.532,104.775 66.04,104.267 68.793,104.267 USB.4
  Bottom Layer w0.254: ?.3 46.736,106.807 47.371,106.172 ?.2 49.276,109.728 50.8,111.252 KEY.4
NetJ1_3: 
NetJ61_2: J61.2 MAX232.14 | length 5.3
  Top Layer w0.254: J61.2 53.113,70.89 MAX232.14
NetJ61_3: J61.3 MAX232.13 | length 5.3
  Top Layer w0.254: J61.3 50.545,74.677 MAX232.13
NetJP0_1: JP0.1 P-R0.9 | length 4.8
  Bottom Layer w0.254: JP0.1 113.97,74.676 114.224,74.93 P-R0.9
NetJP1_1: JP1.1 P-R1.9 | length 3.9
  Top Layer w0.254: JP1.1 76.073,74.676 76.2,74.803 P-R1.9
NetJP2_1: JP2.1 P-R2.1 | length 4.5
  Top Layer w0.254: JP2.1 112.649,49.53 P-R2.1
NetJP3_1: JP3.1 P-R3.9 | length 4.3
  Top Layer w0.254: JP3.1 75.184,49.53 P-R3.9
NetJP6_1: JP5.1 R3.1 | length 24.3
  Top Layer w0.254: JP5.1 52.654,50.8 55.702,53.848 59.69,53.848 60.325,54.483 R3.1
NetJP7_1: 24C02.6 JP7.1 R5.1 | length 16.2
  Top Layer w0.254: JP7.1 125.095,71.755 125.095,69.215 126.299,68.011 R5.1 127.127,62.611 128.906,60.832 24C02.6
NetJP7_3: 24C02.5 JP7.3 R4.1 | length 13.1
  Top Layer w0.254: JP7.3 131.379,65.725 R4.1 131.446,62.544 24C02.5
NetJP9_18: JP9.18
NetLED1_1: LED1.1 R1.2 | length 4.5
  Top Layer w0.254: LED1.1 59.563,98.425 61.021,96.967 61.021,96.078 R1.2
NetLS1_1: LS1.1 Q9.3 | length 12.3
  Top Layer w0.254: LS1.1 48.26,55.372 52.652,59.764 Q9.3
NetQ1_1: Q1.1 R20.2 | length 7.1
  Top Layer w0.254: Q1.1 120.401,88.387 120.843,87.945 R20.2
NetQ2_1: Q2.1 R21.2 | length 5.2
  Top Layer w0.254: Q2.1 124.592,90.419 124.968,90.043 126.111,90.043 126.492,89.662 R21.2
NetQ3_1: Q3.1 R22.2 | length 3.9
  Top Layer w0.254: R22.2 128.524,89.916 128.91,90.302 Q3.1
NetQ4_1: Q4.1 R23.2 | length 5.5
  Top Layer w0.254: R23.2 132.395,87.945 133.228,88.778 Q4.1
NetQ9_2: Q9.1 R3.2 | length 5.7
  Top Layer w0.254: Q9.1 55.885,58.425 56.134,58.674 57.912,58.674 58.735,59.497 R3.2
P0.0: D1-0.2 JP8.7 JP9.7 MCU.39 P0.0.1 R11.1 | length 101.3
  Top Layer w0.254: MCU.39 102.996,89.788 108.585,95.377 D1-0.2 ; P0.0.1 142.052,93.98 R11.1 ; JP8.7 JP9.7
  Bottom Layer w0.254: MCU.39 103.758,89.788 107.95,93.98 P0.0.1 147.955,84.709 147.955,74.676 148.844,73.787 153.035,73.787 154.178,72.644 154.178,63.373 JP8.7
P0.1: D2-0.2 JP8.8 JP9.8 MCU.38 P0.0.2 R12.1 | length 108.5
  Top Layer w0.254: MCU.38 102.996,87.248 108.585,92.837 D2-0.2 ; P0.0.2 142.052,91.44 R12.1 ; JP8.8 JP9.8
  Bottom Layer w0.254: MCU.38 103.758,87.248 107.95,91.44 P0.0.2 147.32,82.804 147.32,74.549 148.844,73.025 152.654,73.025 153.543,72.136 153.543,62.103 155.448,60.198 159.766,60.198 160.528,60.96 160.528,62.611 JP9.8
P0.2: D3-0.2 JP8.9 JP9.9 MCU.37 P0.0.3 R13.1 | length 103
  Top Layer w0.254: MCU.37 102.742,84.708 108.331,90.297 D3-0.2 ; P0.0.3 142.052,88.9 R13.1 ; v1(152.908,60.325) 152.908,63.373 JP8.9 JP9.9
  Bottom Layer w0.254: MCU.37 104.393,84.708 108.585,88.9 P0.0.3 146.685,80.899 146.685,74.295 148.463,72.517 151.765,72.517 152.908,71.374 v1(152.908,60.325)
P0.3: D4-0.2 JP8.10 JP9.10 MCU.36 P0.0.4 R14.1 | length 86.7
  Top Layer w0.254: MCU.36 102.869,82.168 108.331,87.63 D4-0.2 ; P0.0.4 142.052,86.36 R14.1 ; v1(150.495,71.501) 152.908,69.088 JP8.10
  Bottom Layer w0.254: MCU.36 104.393,82.168 108.585,86.36 P0.0.4 146.177,78.867 146.177,73.66 148.336,71.501 v1(150.495,71.501) ; JP8.10 JP9.10
P0.4: D5-0.2 JP8.11 JP9.11 MCU.35 P0.0.5 R15.1 | length 93.3
  Top Layer w0.254: MCU.35 102.615,79.628 108.077,85.09 D5-0.2 ; P0.0.5 142.052,83.82 R15.1 ; v1(145.542,69.342) 150.495,69.342 152.019,67.818 156.972,67.818 157.734,68.58 157.734,69.977 JP8.11 JP9.11
  Bottom Layer w0.254: MCU.35 104.647,79.628 108.966,83.947 138.557,83.947 P0.0.5 145.542,76.962 v1(145.542,69.342)
P0.5: D6-0.2 JP8.12 JP9.12 MCU.34 P0.0.6 R16.1 | length 87.6
  Top Layer w0.254: MCU.34 102.869,77.088 108.331,82.55 D6-0.2 ; P0.0.6 R16.1 ; v1(144.272,70.231) 146.939,72.898 154.813,72.898 JP8.12 JP9.12
  Bottom Layer w0.254: MCU.34 103.504,77.088 107.823,81.407 117.983,81.407 120.015,83.439 136.525,83.439 P0.0.6 144.272,75.692 v1(144.272,70.231)
P0.6: D7-0.2 JP8.13 JP9.13 MCU.33 P0.0.7 R17.1 | length 84.7
  Top Layer w0.254: MCU.33 102.869,74.548 108.331,80.01 D7-0.2 ; P0.0.7 R17.1 ; v1(143.002,72.898) 144.018,73.914 153.289,73.914 JP8.13 JP9.13
  Bottom Layer w0.254: MCU.33 103.25,74.548 107.569,78.867 117.221,78.867 121.158,82.804 134.62,82.804 P0.0.7 143.002,74.422 v1(143.002,72.898)
P0.7: D8-0.2 JP8.14 JP9.14 MCU.32 P0.0.8 R18.1 | length 84.9
  Top Layer w0.254: MCU.32 102.869,72.008 108.331,77.47 D8-0.2 ; R18.1 P0.0.8 140.081,74.803 151.638,74.803 JP8.14 JP9.14
  Bottom Layer w0.254: MCU.32 102.742,72.008 107.061,76.327 117.348,76.327 117.983,76.962 117.983,78.74 121.539,82.296 132.588,82.296 P0.0.8
P1.0: D1-1.2 MCU.1 P1.0.1 | length 81.3
  Top Layer w0.254: D1-1.2 72.71,94.3 73.296,93.714 83.446,93.714 MCU.1 v1(89.789,92.328)
  Bottom Layer w0.254: v1(89.789,92.328) 93.904,96.443 117.827,96.443 117.954,96.316 147.143,96.316 P1.0.1
P1.1: D2-1.2 MCU.2 P1.0.2 | length 90.9
  Top Layer w0.254: D2-1.2 72.71,92.009 73.545,91.174 83.446,91.174 MCU.2
  Bottom Layer w0.254: MCU.2 86.232,89.788 87.122,90.678 87.122,95.25 88.823,96.951 118.335,96.951 118.462,96.824 150.572,96.824 150.622,96.774 150.622,92.583 P1.0.2
P1.2: D3-1.2 MCU.3 P1.0.3 | length 101.1
  Top Layer w0.254: D3-1.2 72.71,89.723 73.579,88.854 83.226,88.854 MCU.3
  Bottom Layer w0.254: MCU.3 84.583,87.248 83.312,88.519 83.312,97.119 83.652,97.459 118.843,97.459 118.97,97.332 150.876,97.332 151.13,97.078 151.13,90.551 P1.0.3
P1.3: D4-1.2 MCU.4 P1.0.4 | length 109.8
  Top Layer w0.254: D4-1.2 72.71,87.183 73.579,86.314 83.226,86.314 MCU.4
  Bottom Layer w0.254: MCU.4 83.059,84.708 82.804,84.963 82.804,97.329 83.773,98.298 104.623,98.298 104.954,97.967 119.366,97.967 119.493,97.84 151.461,97.84 151.765,97.536 151.765,88.646 P1.0.4
P1.4: D5-1.2 MCU.5 P1.0.5 | length 118.4
  Top Layer w0.254: D5-1.2 72.71,84.643 73.787,83.566 83.434,83.566 MCU.5
  Bottom Layer w0.254: MCU.5 82.805,82.168 82.296,82.677 82.296,97.54 83.562,98.806 105.131,98.806 105.462,98.475 119.874,98.475 120.001,98.348 152.14,98.348 152.273,98.215 152.273,84.709 151.384,83.82 P1.0.5
P1.5: D6-1.2 Download.1 MCU.6 P1.0.6 | length 166.9
  Top Layer w0.254: D6-1.2 72.71,81.976 73.66,81.026 83.434,81.026 MCU.6 89.915,79.628 91.186,80.899 91.186,108.839 Download.1
  Bottom Layer w0.254: MCU.6 82.551,79.628 81.788,80.391 81.788,97.75 83.352,99.314 105.385,99.314 105.716,98.983 120.382,98.983 120.509,98.856 152.35,98.856 152.781,98.425 152.781,82.296 151.765,81.28 P1.0.6
P1.6: D7-1.2 Download.9 MCU.7 P1.0.7 | length 182.5
  Top Layer w0.254: D7-1.2 72.71,79.563 73.787,78.486 83.434,78.486 MCU.7 ; v1(97.028,77.216) Download.9
  Bottom Layer w0.254: v1(97.028,77.216) 96.9,77.088 MCU.7 81.66,77.088 81.28,77.468 81.28,97.961 83.141,99.822 105.816,99.822 106.147,99.491 120.89,99.491 121.017,99.364 153.156,99.364 153.416,99.104 153.416,80.01 152.146,78.74 P1.0.7
P1.7: D8-1.2 Download.7 MCU.8 P1.0.8 | length 189.9
  Top Layer w0.254: D8-1.2 72.71,77.023 73.787,75.946 83.434,75.946 MCU.8 ; v1(94.488,74.676) Download.7
  Bottom Layer w0.254: v1(94.488,74.676) 94.36,74.548 MCU.8 81.662,74.548 80.772,75.438 80.772,98.171 82.931,100.33 106.324,100.33 106.655,99.999 121.855,99.999 121.982,99.872 153.366,99.872 153.924,99.314 153.924,77.597 152.527,76.2 P1.0.8
P2.0: D1-2.2 MCU.21 P2.0.1@138.684,49.784 P2.0.2@116.355,42.331 | length 82
  Top Layer w0.254: MCU.21 103.759,43.815 108.077,48.133 108.077,51.181 108.966,52.07 D1-2.2 ; P2.0.2@116.355,42.331 117.769,42.331 125.222,49.784 P2.0.1@138.684,49.784
  Bottom Layer w0.254: MCU.21 132.715,43.815 P2.0.1@138.684,49.784
P2.1: D2-2.2 MCU.22 P2.0.2@138.684,52.324 P2.1.2 | length 78.5
  Top Layer w0.254: MCU.22 103.378,46.355 107.315,50.292 107.315,53.848 108.077,54.61 D2-2.2 ; P2.1.2 129.072,42.331 132.08,45.339 139.573,45.339 140.716,46.482 140.716,50.292 P2.0.2@138.684,52.324
  Bottom Layer w0.254: MCU.22 132.715,46.355 P2.0.2@138.684,52.324
P2.2: D3-2.2 MCU.23 P2.0.3@138.684,54.864 P2.2.2 | length 73.6
  Top Layer w0.254: MCU.23 103.251,48.895 106.553,52.197 106.553,56.388 107.315,57.15 D3-2.2 ; P2.0.3@138.684,54.864 141.478,52.07 141.478,43.053 140.756,42.331 P2.2.2
  Bottom Layer w0.254: MCU.23 102.997,48.895 109.982,55.88 137.668,55.88 P2.0.3@138.684,54.864
P2.3: D4-2.2 MCU.24 P2.0.4@138.684,57.404 P2.3.2 | length 86.7
  Top Layer w0.254: MCU.24 103.378,51.435 105.918,53.975 105.918,59.055 106.553,59.69 D4-2.2 ; P2.0.4@138.684,57.404 138.938,57.404 142.113,54.229 142.113,41.529 143.51,40.132 149.208,40.132 P2.3.2
  Bottom Layer w0.254: MCU.24 102.743,51.435 109.601,58.293 120.904,58.293 121.793,57.404 P2.0.4@138.684,57.404
P2.4: D5-2.2 MCU.25 P2.0.5 R20.1 | length 95.3
  Top Layer w0.254: MCU.25 103.632,53.975 105.181,55.524 105.181,60.96 106.451,62.23 D5-2.2 ; R20.1 123.952,84.328 125.222,83.058 132.461,83.058 133.223,82.296 133.223,73.406 134.62,72.009 134.62,64.008 P2.0.5
  Bottom Layer w0.254: MCU.25 102.489,53.975 109.474,60.96 137.668,60.96 P2.0.5
P2.5: D6-2.2 MCU.26 P2.0.6 R21.1 | length 90.5
  Top Layer w0.254: MCU.26 103.632,56.515 104.673,57.556 104.673,62.992 106.451,64.77 D6-2.2 ; R21.1 126.492,84.709 127.635,83.566 132.715,83.566 133.731,82.55 133.731,74.422 135.89,72.263 135.89,65.278 P2.0.6
  Bottom Layer w0.254: MCU.26 102.235,56.515 109.347,63.627 137.541,63.627 P2.0.6
P2.6: D7-2.2 MCU.27 P2.0.7 R22.1 | length 87.6
  Top Layer w0.254: MCU.27 102.235,59.055 103.632,60.452 103.632,66.675 104.267,67.31 D7-2.2 ; R22.1 128.524,84.709 128.905,84.328 133.985,84.328 134.493,83.82 134.493,75.565 137.16,72.898 137.16,66.548 P2.0.7
  Bottom Layer w0.254: MCU.27 102.489,59.055 109.601,66.167 137.541,66.167 P2.0.7
P2.7: D8-2.2 MCU.28 P2.0.8 R23.1 | length 81.8
  Top Layer w0.254: MCU.28 102.108,61.595 102.997,62.484 102.997,66.802 106.045,69.85 D8-2.2 ; R23.1 134.554,86.045 135.89,84.709 135.89,76.454 138.684,73.66 P2.0.8
  Bottom Layer w0.254: MCU.28 104.292,61.595 111.277,68.58 137.668,68.58 P2.0.8
P3.0: D1-3.2 JP8.4 JP9.4 MAX232.12 MCU.10 P3.0.1 | length 161
  Top Layer w0.254: v1(68.834,70.485) 69.342,69.977 D1-3.2 72.71,69.911 73.914,68.707 84.071,68.707 MCU.10 ; v1(143.764,50.038) 144.653,50.927 v1(153.162,50.927)
  Bottom Layer w0.254: MAX232.12 56.768,77.217 58.039,75.946 68.199,75.946 68.834,75.311 v1(68.834,70.485) ; MCU.10 89.536,69.468 95.504,63.5 95.504,42.037 96.52,41.021 134.747,41.021 v1(143.764,50.038) 143.764,61.976 P3.0.1 ; v1(153.162,50.927) JP8.4 JP9.4
P3.1: D2-3.2 JP8.5 JP9.5 MAX232.11 MCU.11 P3.0.2 | length 168.2
  Top Layer w0.254: v1(70.104,67.437) D2-3.2 72.71,67.244 73.914,66.04 83.944,66.04 MCU.11 ; JP8.5 JP9.5
  Bottom Layer w0.254: MAX232.11 56.768,79.757 58.039,78.486 68.834,78.486 70.104,77.216 v1(70.104,67.437) ; MCU.11 89.409,66.928 92.71,63.627 92.71,41.656 94.361,40.005 141.859,40.005 142.621,40.767 142.621,43.942 145.161,46.482 145.161,60.833 P3.0.2 151.257,63.119 151.257,57.531 152.4,56.388 JP8.5
P3.2: 1.1 D3-3.2 DS18B20.2 JP8.6 JP9.6 MCU.12 P3.0.3 | length 190.2
  Top Layer w0.254: D3-3.2 72.71,64.704 73.914,63.5 81.915,63.5 82.55,64.135 MCU.12 92.964,64.135 v1(97.155,68.326) ; DS18B20.2 128.712,79.052 1.1 ; P3.0.3 151.105,60.731 151.105,59.944 152.121,58.928 JP8.6 JP9.6
  Bottom Layer w0.254: MCU.12 89.408,64.135 90.551,62.992 90.551,40.64 91.948,39.243 145.415,39.243 145.796,39.624 145.796,58.928 P3.0.3 ; v1(97.155,68.326) 101.981,68.326 106.299,72.644 116.713,72.644 118.491,74.422 118.491,78.486 121.793,81.788 125.976,81.788 DS18B20.2
P3.3: D4-3.2 JP7.2 JP9.15 MCU.13 P3.0.4 | length 185
  Top Layer w0.254: D4-3.2 72.71,62.037 73.787,60.96 81.28,60.96 81.915,61.595 MCU.13 ; v1(143.383,65.913) P3.0.4 151.638,57.658 159.766,57.658 160.782,58.674 160.782,80.137 JP9.15
  Bottom Layer w0.254: MCU.13 88.392,61.595 90.043,59.944 90.043,37.592 91.44,36.195 145.288,36.195 146.304,37.211 146.304,56.896 P3.0.4 ; JP7.2 136.144,73.152 v1(143.383,65.913)
P3.4: D5-3.2 JP7.4 JP9.16 MCU.14 P3.0.5 | length 192.6
  Top Layer w0.254: D5-3.2 72.71,59.497 73.787,58.42 81.915,58.42 82.55,59.055 MCU.14 ; v1(142.24,58.42) 148.336,58.42 P3.0.5 151.638,55.118 160.655,55.118 161.417,55.88 161.417,82.042 JP9.16
  Bottom Layer w0.254: MCU.14 88.392,59.055 89.535,57.912 89.535,36.576 90.424,35.687 145.923,35.687 146.939,36.703 146.939,54.991 P3.0.5 ; JP7.4 137.795,70.612 142.24,66.167 v1(142.24,58.42)
P3.5: D6-3.2 JP9.17 MCU.15 P3.0.6 | length 164.7
  Top Layer w0.254: D6-3.2 72.71,56.957 73.787,55.88 81.28,55.88 81.915,56.515 MCU.15 ; P3.0.6 151.638,52.578 161.417,52.578 161.925,53.086 161.925,84.074 JP9.17
  Bottom Layer w0.254: MCU.15 87.757,56.515 88.392,55.88 88.392,36.068 89.281,35.179 146.304,35.179 147.447,36.322 147.447,52.959 P3.0.6
P3.6: D7-3.2 MCU.16 P3.0.7 | length 112.5
  Top Layer w0.254: D7-3.2 72.71,54.417 73.787,53.34 81.28,53.34 81.915,53.975 MCU.16
  Bottom Layer w0.254: MCU.16 87.503,53.975 87.884,53.594 87.884,35.687 88.9,34.671 147.066,34.671 148.209,35.814 148.209,51.181 P3.0.7
P3.7: D8-3.2 JP5.2 MCU.17 P3.0.8 | length 142
  Top Layer w0.254: JP5.2 53.899,48.26 56.439,50.8 71.313,50.8 D8-3.2 72.71,51.75 73.66,50.8 81.28,50.8 81.915,51.435 MCU.17
  Bottom Layer w0.254: MCU.17 86.36,51.435 87.376,50.419 87.376,35.179 88.392,34.163 147.447,34.163 149.352,36.068 P3.0.8
PSEN: ALE.2 MCU.29 | length 25.6
  Top Layer w0.254: MCU.29 102.108,64.135 102.489,64.516 102.489,67.056 106.807,71.374 120.558,71.374 ALE.2
RES: Download.5 MCU.9 RES.2 | length 95.2
  Top Layer w0.254: RES.2 63.373,47.371 v1(80.645,47.371) ; MCU.9 90.804,72.008 91.948,73.152 Download.5
  Bottom Layer w0.254: v1(80.645,47.371) 80.645,69.977 82.676,72.008 MCU.9
VCC: 1.2 24C02.8 +5V.1 +5V.2@62.484,115.824 +5V.2@159.38,103.348 +5V.3 +5V.4 C1.1 C2.1 C5.1 C6.2 Download.2 DS18B20.1 JP0.2 JP1.2 JP2.2 JP3.2 JP8.2 JP8.15 JP9.2 JP9.19 KEY.2 MAX232.16 MCU.31 MCU.40 Q1.2 Q2.2 Q3.2 Q4.2 Q9.2 R1.1 R4.2 R5.2 Ravr.2 S52.2 | length 708.9
  Top Layer w0.254: MAX232.16 53.57,67.057 53.061,66.548 53.061,61.849 47.244,56.032 47.244,52.426 47.752,51.918 52.857,51.918 57.785,56.845 Q9.2 ; Ravr.2 54.422,42.606 55.459,41.569 S52.2 ; +5V.4 +5V.3 62.484,115.824 65.024,115.824 86.741,115.824 Download.2 ; KEY.2 55.499,110.617 51.435,110.617 46.101,105.283 46.101,99.568 61.468,99.568 61.976,99.06 R1.1 64.074,97.978 64.135,97.917 64.135,91.059 64.262,90.932 ; C1.1 62.459,90.932 64.262,90.932 ; C6.2 C5.1 64.262,90.932 ; JP1.2 75.311,72.009 81.534,72.009 82.677,70.866 95.25,70.866 96.648,69.468 MCU.31 102.361,69.468 107.569,74.676 JP0.2 ; JP2.2 111.379,50.8 117.221,50.8 123.826,57.405 24C02.8 123.826,62.027 R5.2@124.399,62.6 ; Q1.2 122.301,92.71 122.428,92.837 ; Q2.2 126.492,92.456 126.111,92.837 ; R4.2 129.921,62.611 129.921,58.928 129.235,58.242 128.321,58.242 127.635,58.928 127.635,60.173 127.076,60.731 125.237,60.731 124.399,61.57 R5.2@124.399,62.6 ; Q3.2 130.81,92.507 131.064,92.761 134.747,92.761 ; Q4.2 135.128,92.456 134.823,92.761 ; v1(140.843,61.341) 140.843,56.769 142.748,54.864 142.748,45.085 143.51,44.323 151.638,44.323 JP8.2 JP9.2 ; +5V.1@159.38,100.808 159.38,103.348 157.734,104.994 157.734,110.744 159.385,112.395 161.29,112.395 162.179,111.506 162.179,94.996 JP9.19 156.464,94.615 156.464,117.475 154.981,118.958 101.686,118.958 v1(100.838,118.11) 100.076,117.348 MCU.40 104.546,92.075 110.007,97.536 116.078,97.536 120.777,92.837 ; 120.777,92.837 122.428,92.837 ; 120.777,92.837 119.888,92.837 119.126,92.075 119.126,86.098 DS18B20.1 125.319,77.5 125.603,77.216 1.2 126.812,75.565 124.399,73.152 R5.2 R5.2@124.399,62.6 ; 122.428,92.837 126.111,92.837 ; 122.428,92.837 126.111,92.837 ; 126.111,92.837 134.747,92.837 ; 134.747,92.761 134.823,92.761 ; 134.747,92.761 134.747,92.837 ; 134.747,92.837 134.823,92.761
  Bottom Layer w0.254: +5V.1@46.101,99.568 44.704,98.171 ; MAX232.16 54.36,66.298 53.848,65.786 ; KEY.2 65.024,111.252 +5V.1@65.024,115.824 ; C6.2 72.644,77.47 JP1.2 ; C2.1 66.167,65.786 53.848,65.786 ; JP3.2 72.263,36.576 71.12,35.433 61.214,35.433 60.96,35.687 60.96,39.687 S52.2 57.387,39.878 45.847,39.878 43.688,42.037 43.688,97.155 44.704,98.171 ; Download.2 89.281,118.11 v1(100.838,118.11) ; 24C02.8 123.826,59.181 125.095,57.912 135.636,57.912 136.398,58.674 139.192,58.674 140.843,60.325 v1(140.843,61.341) ; JP8.15 157.48,83.185 157.48,90.297 JP9.19 ; 44.704,98.171 44.704,66.802 45.72,65.786 53.848,65.786
VO: 
X1: CX1.1 MCU.19 Y.1 | length 16.4
  Top Layer w0.254: CX1.1 77.47,36.83 Y.1 82.423,41.783 82.423,45.72 83.058,46.355 MCU.19
X2: CX2.1 MCU.18 Y.2 | length 13.9
  Top Layer w0.254: CX2.1 77.47,44.45 Y.2 81.915,46.355 81.915,47.752 83.058,48.895 MCU.18
pads on no net: AVR.3 AVR.4 Download.3 J61.1 J61.4 J61.6 J61.7 J61.8 J61.9 J61.10 J61.11 KEY.0 MAX232.7 MAX232.8 MAX232.9 MAX232.10 P2.0.3@109.355,42.331 P2.0.4@109.355,37.831 P2.1.3 P2.1.4 P2.2.3 P2.2.4 P2.3.3 P2.3.4 S52.3 S52.4 USB.2 USB.3 USB.5 USB.6

## Polygon pours and split planes (outlines as drawn)
no net on Top Layer (hatched 45Degree grid 0.508 track 0.203): 37.998,28.156 39.649,29.804 159.918,29.804 161.569,28.156 161.569,-53.764 159.918,-55.413 39.776,-55.413 38.125,-53.764 38.125,28.283
no net on Bottom Layer (hatched 45Degree grid 0.508 track 0.203): 37.185,29.566 38.709,31.09 158.978,31.09 160.629,29.439 160.629,-52.476 158.978,-54.127 38.836,-54.127 37.185,-52.476

## Silkscreen, mask and mechanical layers (free items; w line width, h text height)
Top Overlay:
  text "S52/AVR" at 88.646,103.759 h1.02
  text "20" at 162.052,93.599 h1.02 r90
  text "GND" at 40.386,91.694 h1.02 r90
  text "DATE" at 126.111,81.534 h1.02
  text "15" at 162.052,80.899 h1.02 r90
  text "VCC" at 120.777,79.502 h1.02
  text "GND" at 131.953,79.375 h1.02
  text "P0.7" at 137.414,73.025 h1.52
  text "P1.7" at 147.32,73.025 h1.52
  text "1" at 124.46,72.771 h1.02
  text "2" at 130.683,72.644 h1.02
  text "4" at 130.683,70.104 h1.02
  text "3" at 124.206,69.977 h1.02
  text "P2.7" at 137.414,69.215 h1.52
  text "PSEN" at 119.253,68.199 h1.02
  text "10" at 162.052,68.199 h1.02 r90
  text "5" at 162.052,55.88 h1.02 r90
  text "S52" at 56.896,51.181 h1.02
  text "AVR" at 63.754,51.181 h1.02
  text "P3.7" at 147.32,46.609 h1.52
  text "1" at 161.925,45.974 h1.02 r90
Mechanical 1:
  lines w0.254: 38.354,35.179 40.386,33.147 ; 160.782,119.634 162.814,117.602
  lines w0.654: 161.036,33.274 40.132,33.147 38.227,35.052 38.227,117.729 40.132,119.634 161.163,119.634 ; 161.036,119.634 162.941,117.729 162.941,35.179 ; 161.163,33.274 162.941,35.052

## Text inside footprints (layer, text, board x,y; h text height)
Download: Top Overlay "10" at 98.552,115.189 h1.27; Top Overlay "9" at 98.552,112.649 h1.27; Top Overlay "1" at 84.836,112.649 h1.27; Top Overlay "2" at 84.328,115.189 h1.27
J61: Top Overlay "6" at 43.583,69.005 h1.5 r90; Top Overlay "9" at 43.583,77.315 h1.5 r90; Top Overlay "5" at 52.983,78.7 h1.5 r90; Top Overlay "1" at 52.983,67.87 h1.5 r90